# EAGLE board bluetooth_bma400 (EAGLE 9.6.2)
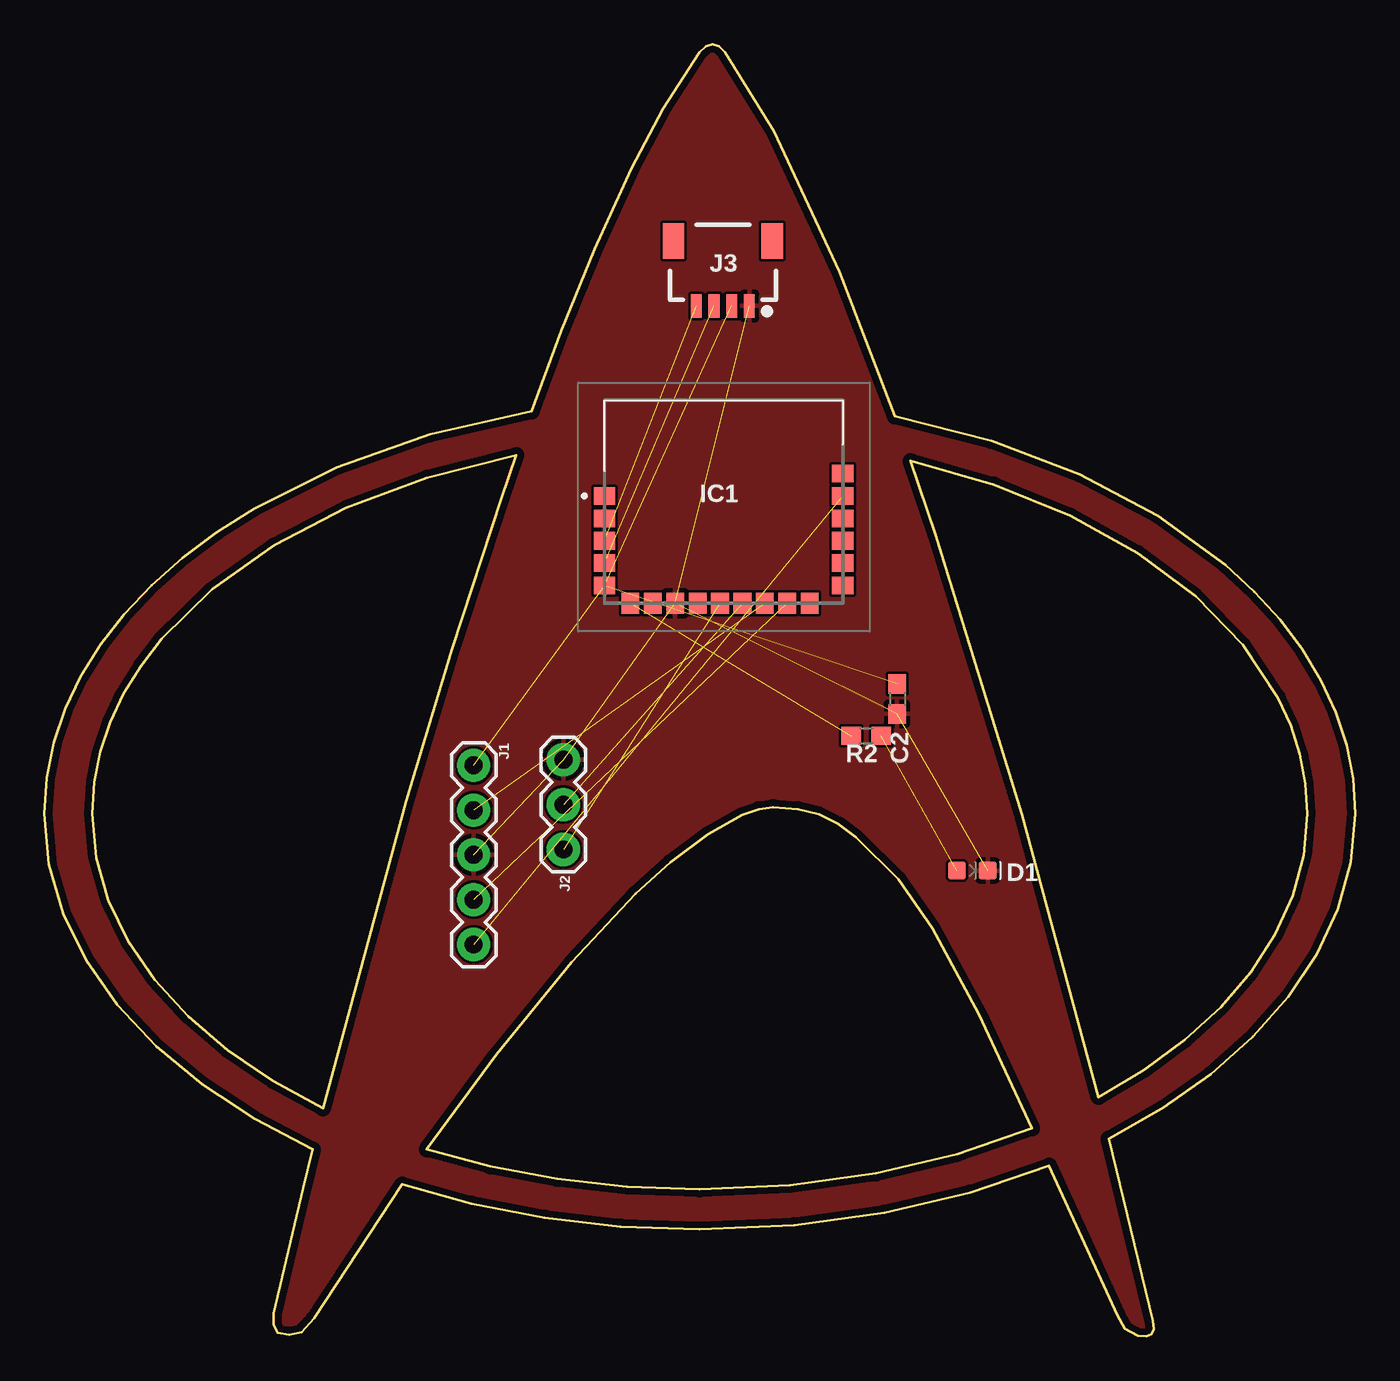
[diagram p0: board, top side]
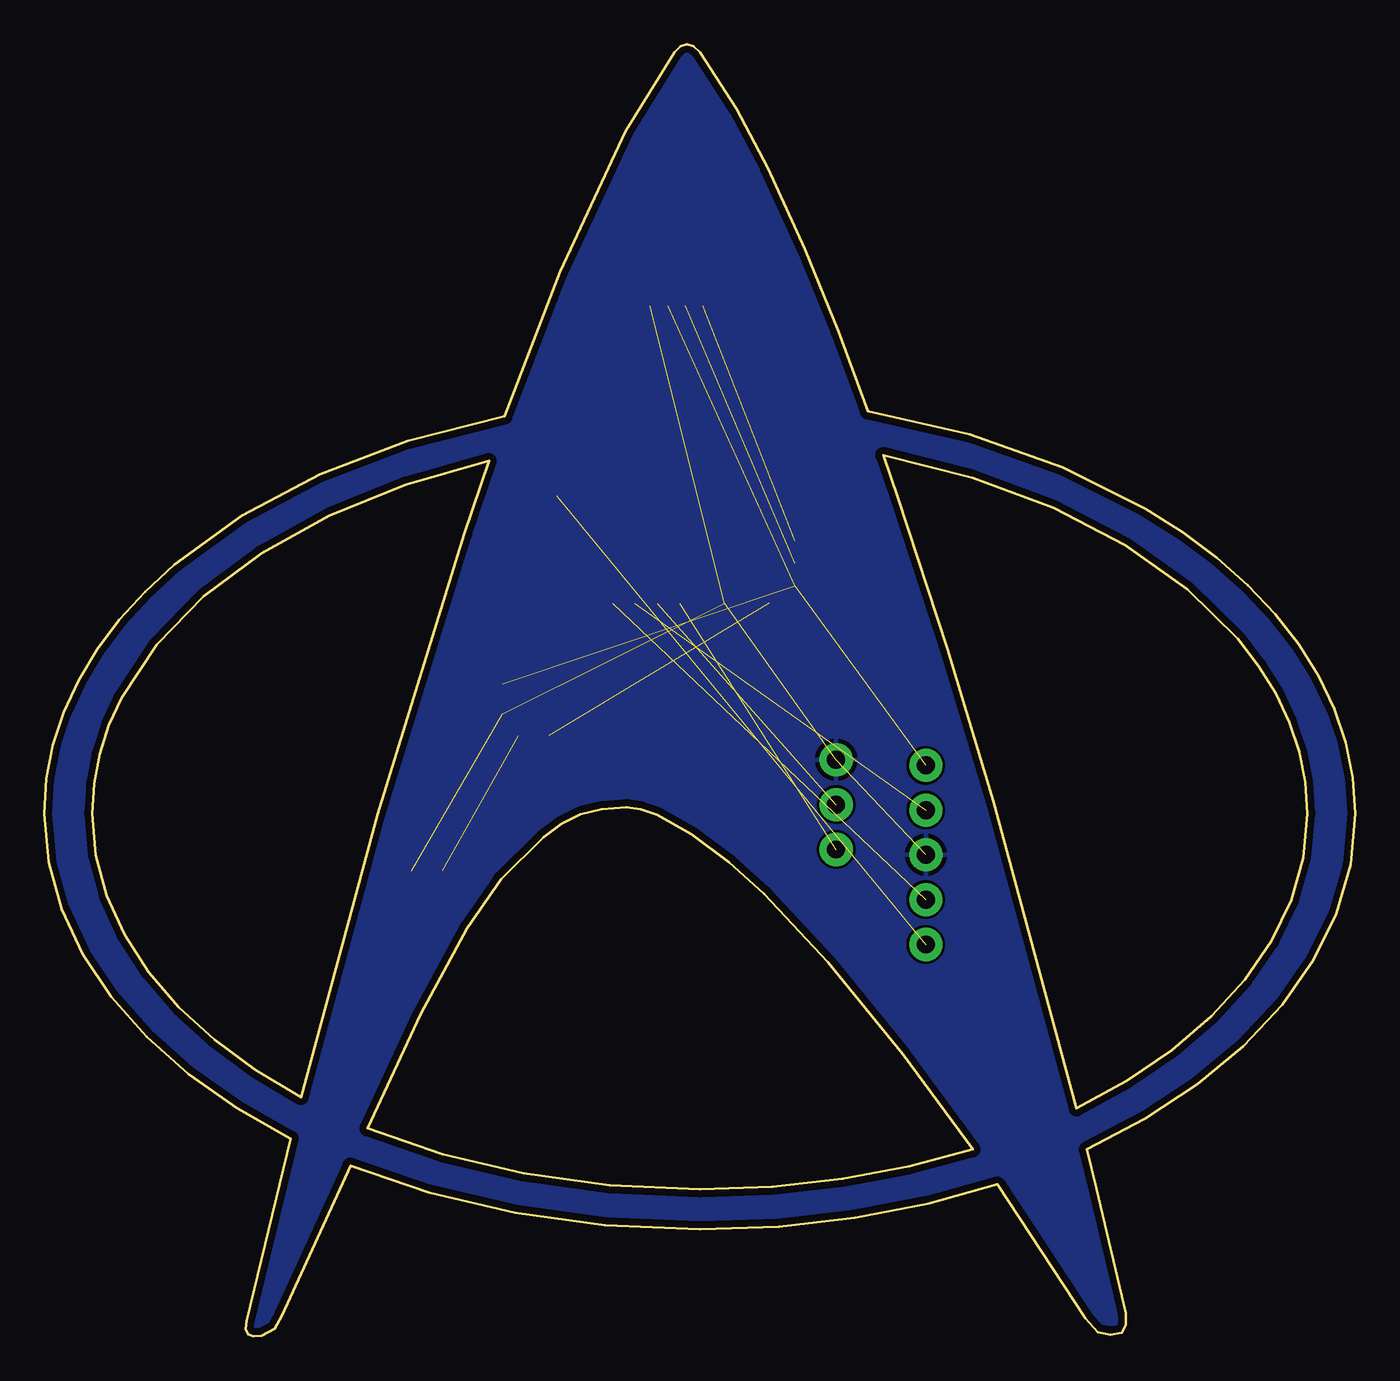
[diagram p1: board, bottom side, seen from below]

Size 74.35 x 73.25 mm. Coordinates in mm from the lower left corner, seen from the top.
Outline: 50.38,23.13 53,18.26 56.01,11.8 51.76,10.34 47.17,9.25 42.29,8.57 37.17,8.34 33.06,8.49 29.09,8.93 25.29,9.64 21.69,10.61 25.67,16 29.9,21.2 33.53,25.1 35.51,26.88 37.65,28.47 39.61,29.57 40.52,29.89 41.33,30.01 42.74,29.9 43.93,29.59 45,29.06 46.04,28.29 48.45,25.92 50.38,23.13
Outline: 49.13,49.62 53.87,48.28 58.18,46.52 62.02,44.4 65.3,41.94 67.97,39.2 69.95,36.21 70.67,34.63 71.2,33.01 71.51,31.34 71.62,29.64 71.41,27.26 70.79,24.97 69.79,22.76 68.42,20.66 66.71,18.67 64.69,16.82 62.37,15.11 59.78,13.56 55.44,29.59 50.54,45.46 49.13,49.62
Outline: 15.82,12.93 12.97,14.49 10.41,16.24 8.17,18.15 6.28,20.21 4.77,22.41 3.65,24.72 2.96,27.14 2.73,29.64 2.84,31.41 3.19,33.13 3.75,34.82 4.52,36.45 5.49,38.02 6.66,39.53 9.52,42.34 13.03,44.84 17.13,46.96 21.73,48.68 26.76,49.95 25.93,47.55 23.12,38.98 20.52,30.35 15.82,12.93
Outline: 29.32,56.97 27.64,52.43 21.88,51.13 16.61,49.28 11.9,46.93 9.79,45.58 7.85,44.13 6.1,42.58 4.55,40.95 3.21,39.23 2.08,37.43 1.19,35.57 0.54,33.65 0.14,31.67 0,29.64 0.28,26.75 1.08,23.97 2.39,21.31 4.15,18.8 6.36,16.45 8.96,14.29 11.93,12.34 15.23,10.61 14.68,8.39 13.02,1.33 13.02,0.66 13.23,0.22 13.91,0.11 14.61,0.24 15.32,1.04 20.31,8.62 24.23,7.53 28.36,6.73 32.69,6.23 37.17,6.06 42.53,6.31 47.66,7.01 52.49,8.15 56.98,9.69 60.85,1.2 61.28,0.45 62.02,0.03 62.5,0 62.79,0.12 62.91,0.4 62.87,0.88 60.37,11.21 63.41,12.94 66.15,14.87 68.54,16.98 70.55,19.25 72.17,21.67 73.36,24.22 74.1,26.88 74.35,29.64 74.22,31.6 73.85,33.52 73.23,35.39 72.4,37.2 71.34,38.94 70.08,40.62 68.61,42.22 66.97,43.74 63.15,46.5 58.7,48.86 53.7,50.76 48.24,52.15 45.08,60.34 41.38,68.32 38.6,72.79 38.26,73.13 37.89,73.25 37.52,73.13 37.17,72.79 35.1,69.59 33.31,66.2 31.21,61.63 29.32,56.97
Copper layers (1*16): Top 0.035559375mm / dielectric 1.6mm / Bottom 0.035559375mm
Design rules "oshpark-2layer": minimum track width 6mil, minimum drill 10mil, track to track 6mil, track to pad 6mil, pad to pad 6mil, via to via 6mil, smd to smd 6mil, copper to edge 15mil, drill to drill 6mil, minimum pad ring 5mil, minimum via ring 5mil, stop-mask expansion 2.5mil, vias tented up to drill 0mil, thermal gap 10mil

## Footprints (pad centres in the part's own frame; a part is rotated, then mirrored left to right if it is on the bottom)
0603 = smd 1.1 x 1: 1 -0.85,0; 2 0.85,0
LED-0603 = smd 1 x 1: A -0.877,0; C 0.877,0
BLUENRGM2SP = smd 1.2 x 1: 1 -6.75,1.27; 2 -6.75,0; 3 -6.75,-1.27; 4 -6.75,-2.54; 5 -6.75,-3.81; 15 6.75,-3.81; 16 6.75,-2.54; 17 6.75,-1.27; 18 6.75,0; 19 6.75,1.27; 20 6.75,2.54 | smd 1 x 1.2: 6 -5.29,-4.81; 7 -4.02,-4.81; 8 -2.75,-4.81; 9 -1.48,-4.81; 10 -0.21,-4.81; 11 1.06,-4.81; 12 2.33,-4.81; 13 3.6,-4.81; 14 4.87,-4.81
1X05 = drill 1.016 pad 1.88: 1 0,0; 2 2.54,0; 3 5.08,0; 4 7.62,0; 5 10.16,0
1X03 = drill 1.016 pad 1.88: 1 0,0; 2 2.54,0; 3 5.08,0
1X04_1MM_RA = smd 0.6 x 1.35: 1 -1.5,0; 2 -0.5,0; 3 0.5,0; 4 1.5,0 | smd 1.2 x 2: NC1 2.8,-3.675; NC2 -2.8,-3.675

## Placement (x,y rotation side)
C2  0.1uF  [0603]  48.36,36.13 270 top
D1  BLUE  [LED-0603]  52.63,26.41 0 top
IC1  BLUENRG-M2SP  [BLUENRGM2SP]  38.53,46.37 0 top
J1  [1X05]  24.36,32.37 270 top
J2  455-1750-1-ND  [1X03]  29.44,27.6 90 top
J3  [1X04_1MM_RA]  38.48,58.41 180 top
R2  820  [0603]  46.61,34.05 0 top

## Library data of the parts
C2 = SparkFun-Capacitors; PROD_ID: CAP-00810
D1 = SparkFun-LED; PROD_ID: DIO-08575
IC1 = SamacSys_Parts; ARROW_PART_NUMBER: BLUENRG-M2SP; ARROW_PRICE-STOCK: https://www.arrow.com/en/products/bluenrg-m2sp/stmicroelectronics; DESCRIPTION: STMicroelectronics; HEIGHT: 2.5mm; MANUFACTURER_NAME: STMicroelectronics; MANUFACTURER_PART_NUMBER: BLUENRG-M2SP; MOUSER_PART_NUMBER: 511-BLUENRG-M2SP; MOUSER_PRICE-STOCK: https://www.mouser.co.uk/ProductDetail/STMicroelectronics/BLUENRG-M2SP?qs=%252B6g0mu59x7IAMQd6TX9bOA%3D%3D
J1 = SparkFun-Connectors
J2 = SparkFun-Connectors; PROD_ID: XXX-00000
J3 = SparkFun-Connectors; PROD_ID: CONN-13694
R2 = SparkFun-Resistors; PROD_ID: RES-10646; SPICEPREFIX: R

## Nets
BOOT: IC1.7
GND: C2.2 D1.C IC1.8 J1.3 J2.3 J3.1
INT1: IC1.20
N$1: D1.A R2.2
RST: IC1.19 J1.5
RX: IC1.11 J2.2
SCL: IC1.3 J3.4
SDA: IC1.4 J3.3
SWCLK: IC1.12 J1.2
SWDIO: IC1.13 J1.4
TEST: IC1.6 R2.1
TX: IC1.10 J2.1
VIN: C2.1 IC1.5 J1.1 J3.2

## Tracks (layer width: path | path; a pad name or v marks a point on that pad's centre or on a via)
GND  (5 unrouted)
  pour Top: 0.26,-3.29 0.26,77.99 68.84,77.99 84.08,9.41 32.01,-21.07
  pour Bottom: -2.28,6.87 -2.28,81.8 113.29,84.34 87.89,4.33 19.31,-10.91
N$1  (1 unrouted)
RST  (1 unrouted)
RX  (1 unrouted)
SCL  (1 unrouted)
SDA  (1 unrouted)
SWCLK  (1 unrouted)
SWDIO  (1 unrouted)
TEST  (1 unrouted)
TX  (1 unrouted)
VIN  (3 unrouted)